# Altium PCB dAir-clove-controls-0.0.0.1.PcbDoc
Units mm, origin at the board's own origin, x right, y up, seen from the top; angles counter-clockwise.
Board outline 30 x 16 mm, 2 copper layers (Top Layer, Bottom Layer); 4 components, 41 nets, 16 pads, 0 vias.
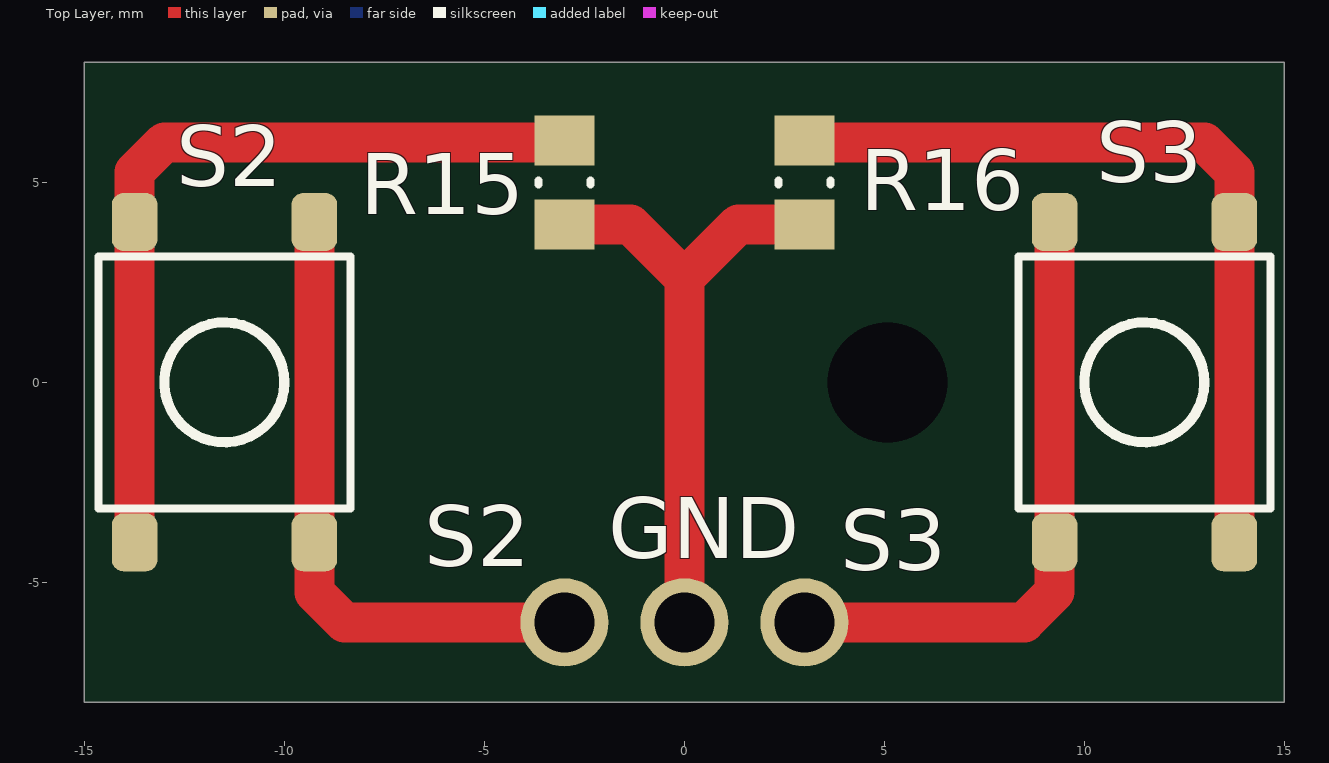
[diagram p0: Top Layer view]
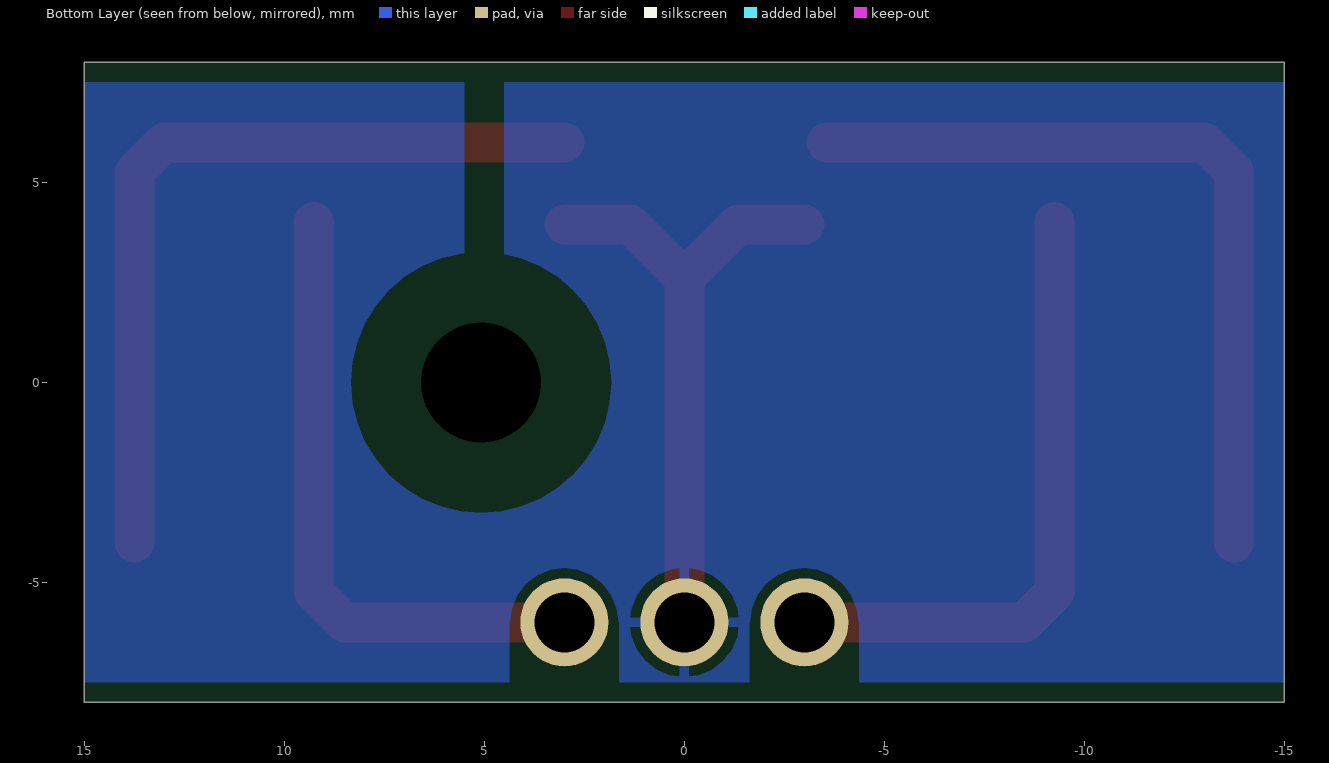
[diagram p1: Bottom Layer view, seen from below]

## Layer stack, top to bottom
Top Solder: solder mask 0.0102, Solder Resist, Dk 3.5
Top Layer: signal copper 0.0356
Dielectric 1: dielectric 0.32, FR-4, Dk 4.8
Bottom Layer: signal copper 0.0356
Bottom Solder: solder mask 0.0102, Solder Resist, Dk 3.5

## Board outline
-15,-8 15,-8 15,8 -15,8

## Design rules (kind name [scope] priority, off if disabled: settings)
Clearance [All] p1: gap=0.25 ignorepadtopadclearanceinfootprint=FALSE
PolygonConnect [All] p1: connectstyle=Relief reliefconductorwidth=0.254 reliefentries=4 polygonreliefangle="90 Angle" airgapwidth=0.254
RoutingVias [All] p1: holewidth=0.711 width=1.27 viastyle="Through Hole" minholewidth=0.711 minwidth=1.27 maxholewidth=0.711 maxwidth=1.27
SolderMaskExpansion [All] p1: expansion=0.102
Width [All] p1: maxlimit=2 minlimit=0.254 preferedwidth=0.254
30 further rules are at their usual default settings.

## Classes and differential pairs
component class dAir: R15 R16 XP2

## Components (designator, comment, footprint, x,y, rotation, side; value= is the part's Value field where it differs from the comment)
R15 "470" RESC0805(2012)_M 3,5 r90 top value="4.30 Ohm"
R16 "470" RESC0805(2012)_M -3,5 r90 top value="4.30 Ohm"
S2 "Comment" DIPT-DTSM-6_V 11.5,0 r90 top
S3 "Comment" DIPT-DTSM-6_V -11.5,0 r90 top

## Footprints (in the part's own frame and the unit in brackets; to place one, negate y for a bottom-side part, rotate by r counter-clockwise, add the part's x,y. Pads: shape width x height; smd on the part's side, far side on the other; paste and mask are expansions set on the pad)
DIPT-DTSM-6_V [mm] "Switch, Through-Hole, 4 Leads, Body 8.5x8.5mm, Row Spacing 9.0mm, Pitch 4.5mm"
  rrect50% 1.448x1.143 smd: 1(4.01,-2.25) 2(-4,-2.25) 3(4.01,2.24) 4(-4,2.24)
  silkscreen extent -3.16,-3.16 3.15,3.15, body extent -4.5,-3.1 4.5,3.1, height 4.5
RESC0805(2012)_M [mm] "Chip Resistor, Body 2.0x1.3mm, IPC Low Density"
  rect 1.25x1.5 smd: 1(-1.05,0) 2(1.05,0)
  silkscreen extent -0.05,-0.65 0.05,0.65, body extent -1.1,-0.67 1.1,0.67, height 0.7

## Part data
R15 R16: library part CMP-1013-00017-1, Case-EIA=0805, Case-Metric=2012, Power="0.125 W", Tolerance="5 %", Technology=SMT

## Free pads (board coordinates)
  round 2.2 hole 1.5: 9(-3,-6) 10(3,-6) 11(0,-6)
  round 0 hole 3: 12(5.08,0)

## Nets (pads, with @x,y where several pads share a name; then routed paths per layer and width w, separated by ;. In a path a pad name is that pad's centre, name@x,y a point inside that pad or via, vN(x,y) a via of type N, cw(c..) or ccw(c..) an arc to the next point about the centre after c; other vN are vias at no path point)
3V: 
5V: 
+E: 
GND: pad.11 R15.1 R16.1 | length 15.7
  Top Layer w1: R16.1 -1.35,3.95 0,2.6 ; pad.11 0,2.6 ; R15.1 1.35,3.95 0,2.6
NetBAT1_1: 
NetC6_2: 
NetC13_1: 
NetC15_2: 
NetC17_1: 
NetC17_2: 
NetC18_1: 
NetC21_1: 
NetDA1_1: 
NetDA1_7: 
NetDA1_9: 
NetDA1_12: 
NetDA1_16: 
NetDA4_1: 
NetDD1_7: 
NetDD1_9: pad.9 S3.1 S3.2 | length 15.8
  Top Layer w1: S3.1 S3.2 -9.25,-5.25 -8.5,-6 pad.9
NetDD1_12: pad.10 S2.3 S2.4 | length 15.8
  Top Layer w1: pad.10 8.5,-6 9.26,-5.24 S2.4 S2.3
NetDD1_25: 
NetDD1_26: 
NetDD1_27: 
NetDD1_33: 
NetDD1_34: 
NetDD1_35: 
NetDD1_36: 
NetHL1_1: 
NetHL2_1: 
NetHL3_2: 
NetHL3_4: 
NetLS1_2: 
NetR13_1: 
NetR13_2: 
NetR14_1: 
NetR14_2: 
NetR15_2: R15.2 S2.1 S2.2 | length 20.3
  Top Layer w1: R15.2@3,6 13,6 13.75,5.25 S2.1 S2.2
NetR16_2: R16.2 S3.3 S3.4 | length 19.8
  Top Layer w1: S3.4 S3.3 -13.74,5.26 -13,6 R16.2@-3.55,6
NetR22_2: 
"V ESP": 

## Polygon pours and split planes (outlines as drawn)
GND on Bottom Layer "Top Layer-No Net" (solid, pour order 0): 4.5,7.5 4.5,3.1 5.5,3.1 5.5,7.5 15,7.5 15,-7.5 4.375,-7.5 4.375,-6 1.625,-6 1.625,-7.5 -1.625,-7.5 -1.625,-6 -4.375,-6 -4.375,-7.5 -15,-7.5 -15,7.5

## Silkscreen, mask and mechanical layers (free items; w line width, h text height)
Top Overlay:
  text "GND" at -1.9,-4.4 h1.52
  text "S2" at -6.5,-4.6 h1.52
  text "S3" at 3.9,-4.7 h1.52
Mechanical 1:
  the board outline again, w1